# Altium PCB Hydro-Node.PcbDoc
Units mm, origin at the board's own origin, x right, y up, seen from the top; angles counter-clockwise.
Board outline 90 x 70 mm, 2 copper layers (Top Layer, Bottom Layer); 22 components, 21 nets, 99 pads, 0 vias.
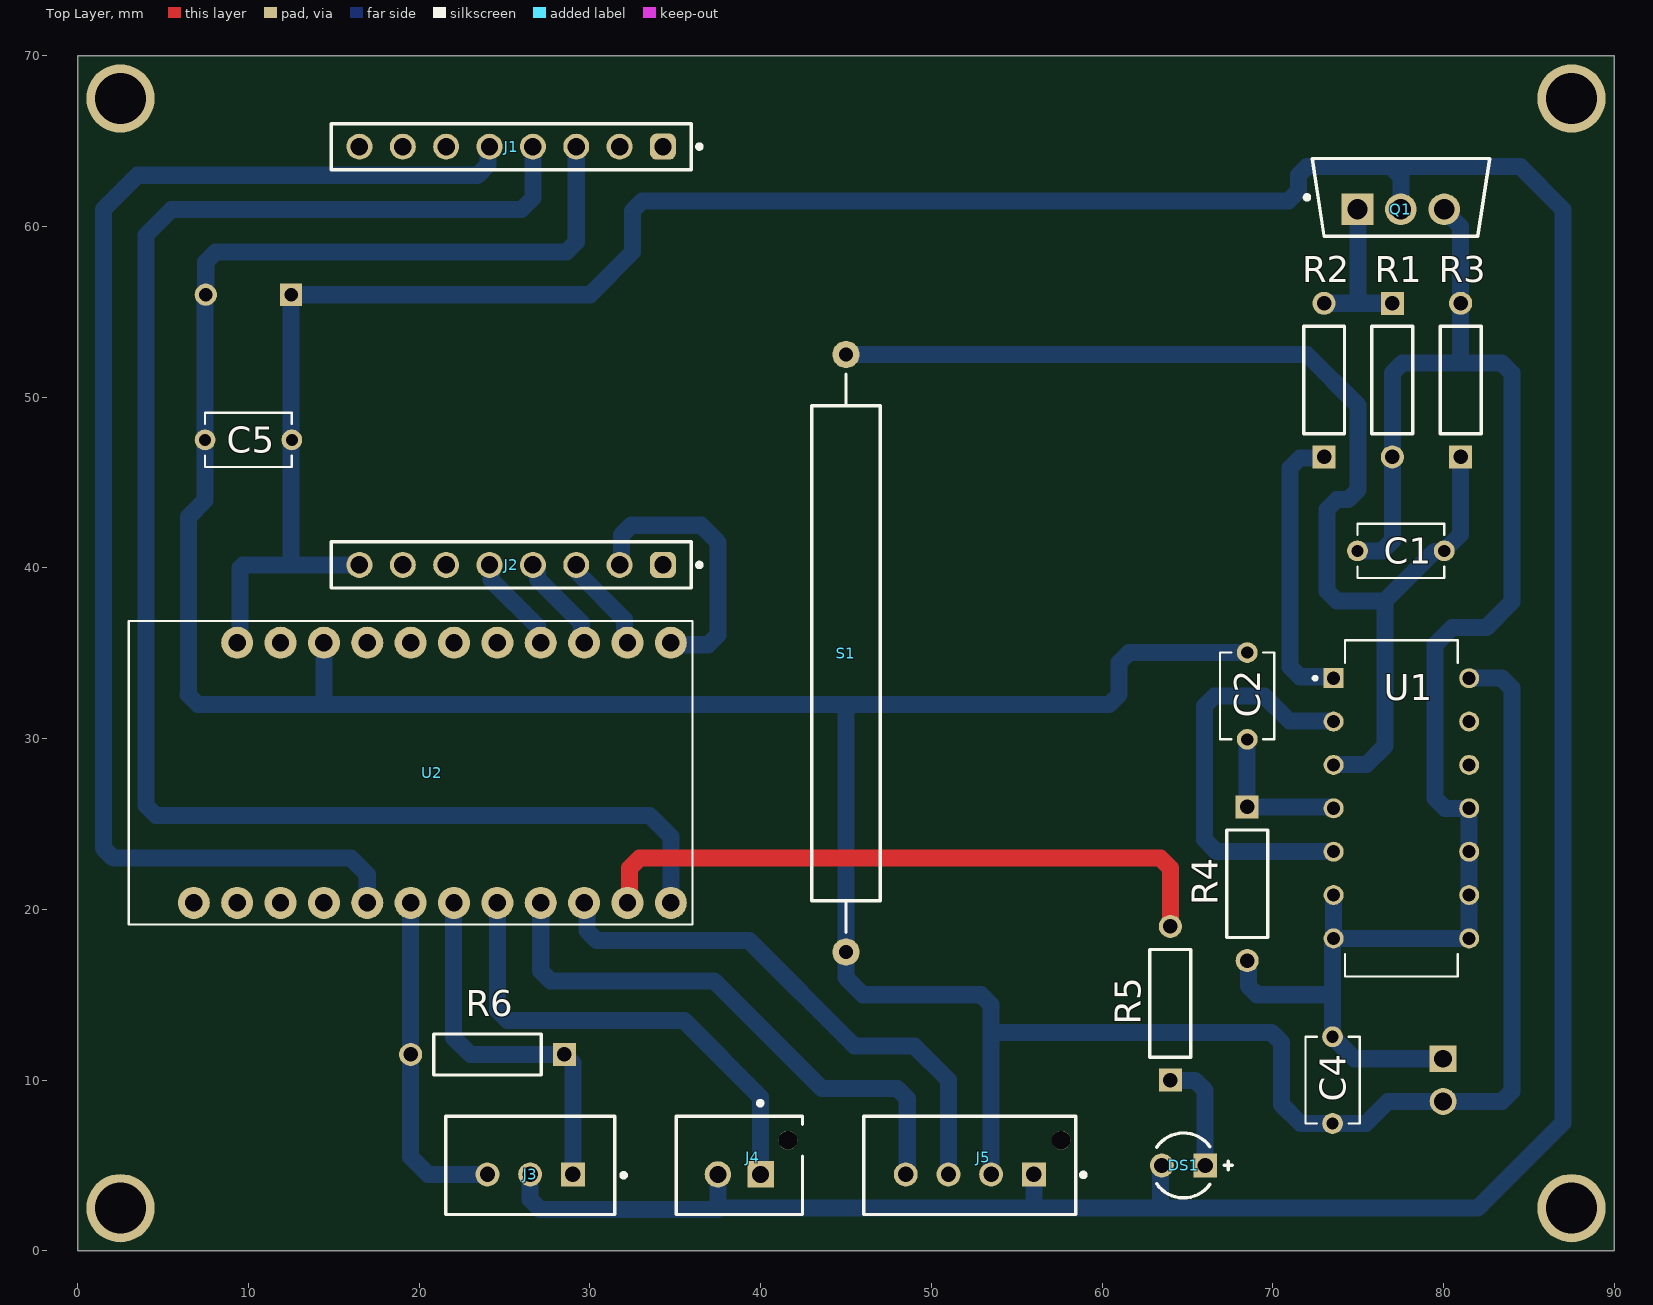
[diagram p0: Top Layer view]
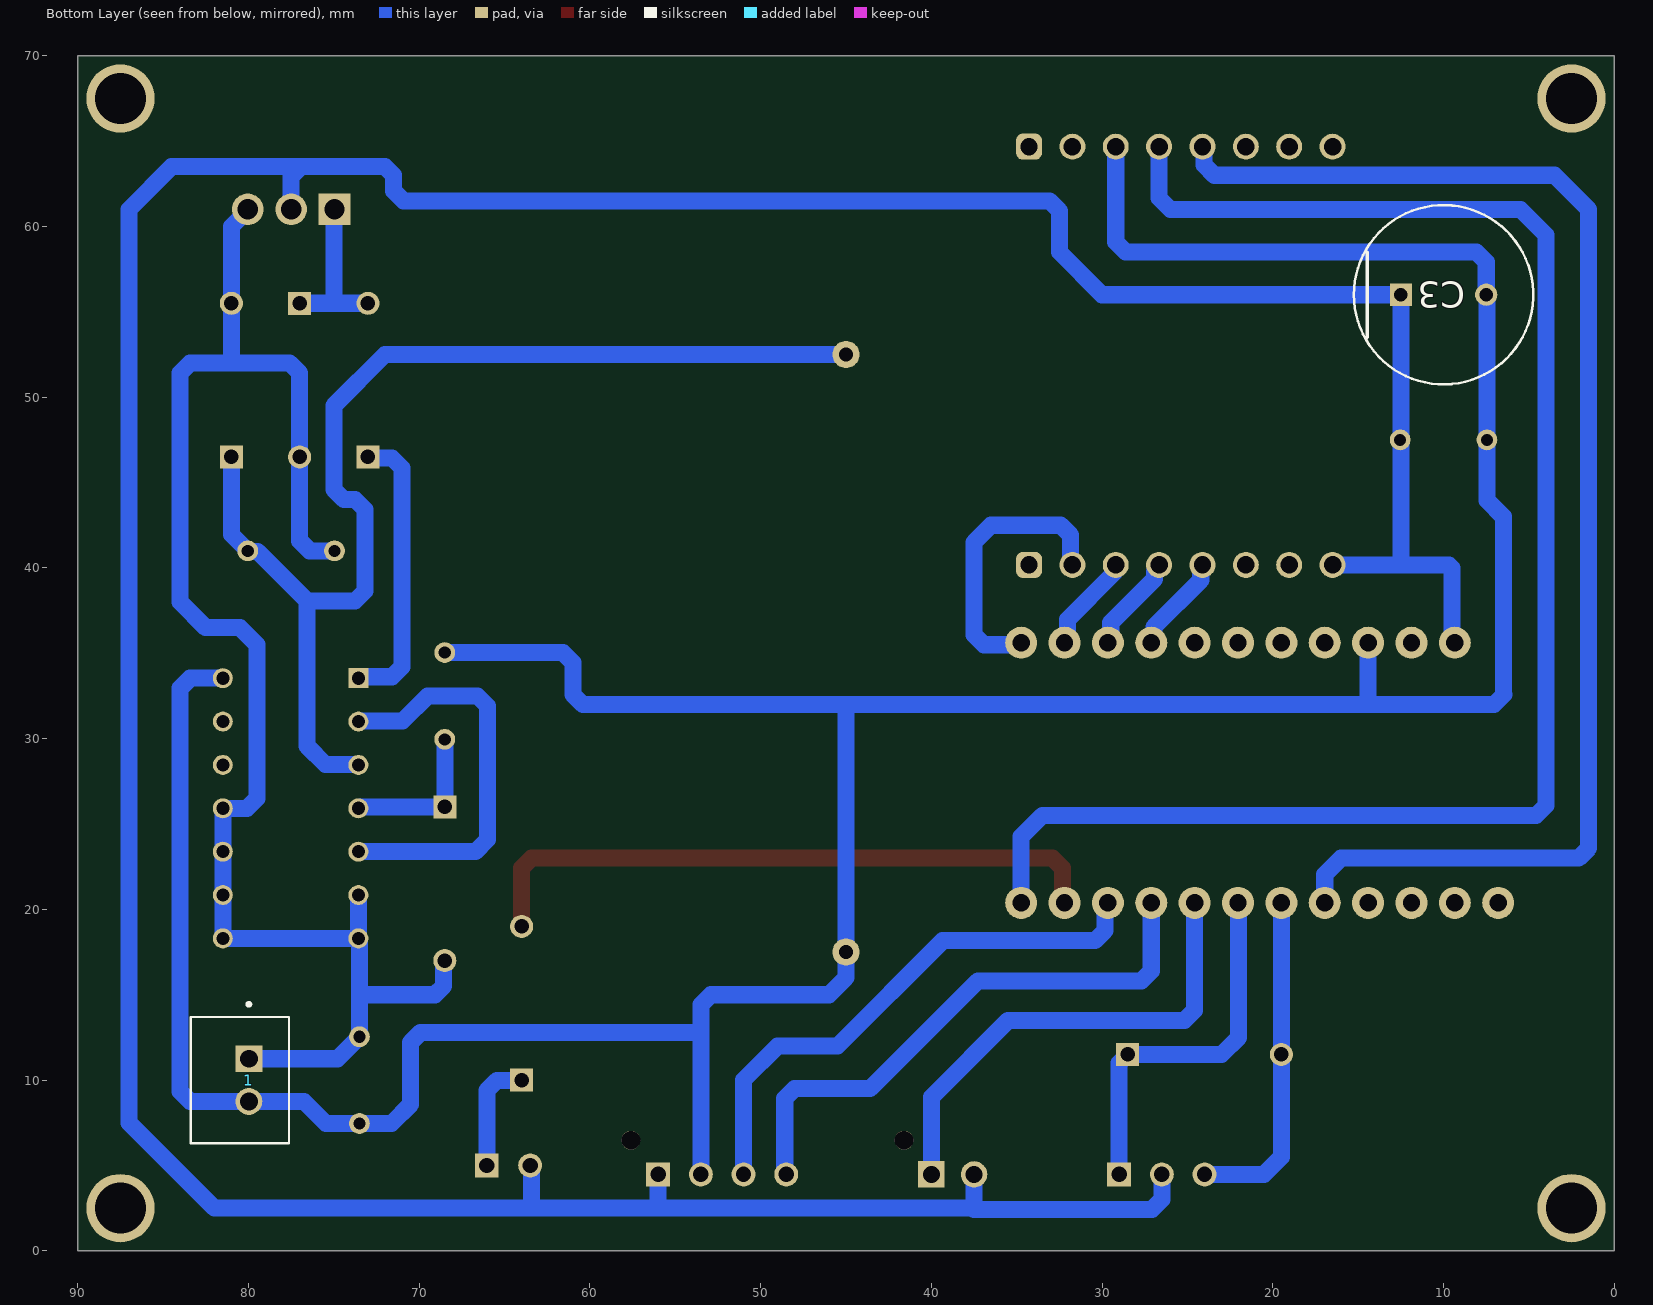
[diagram p1: Bottom Layer view, seen from below]
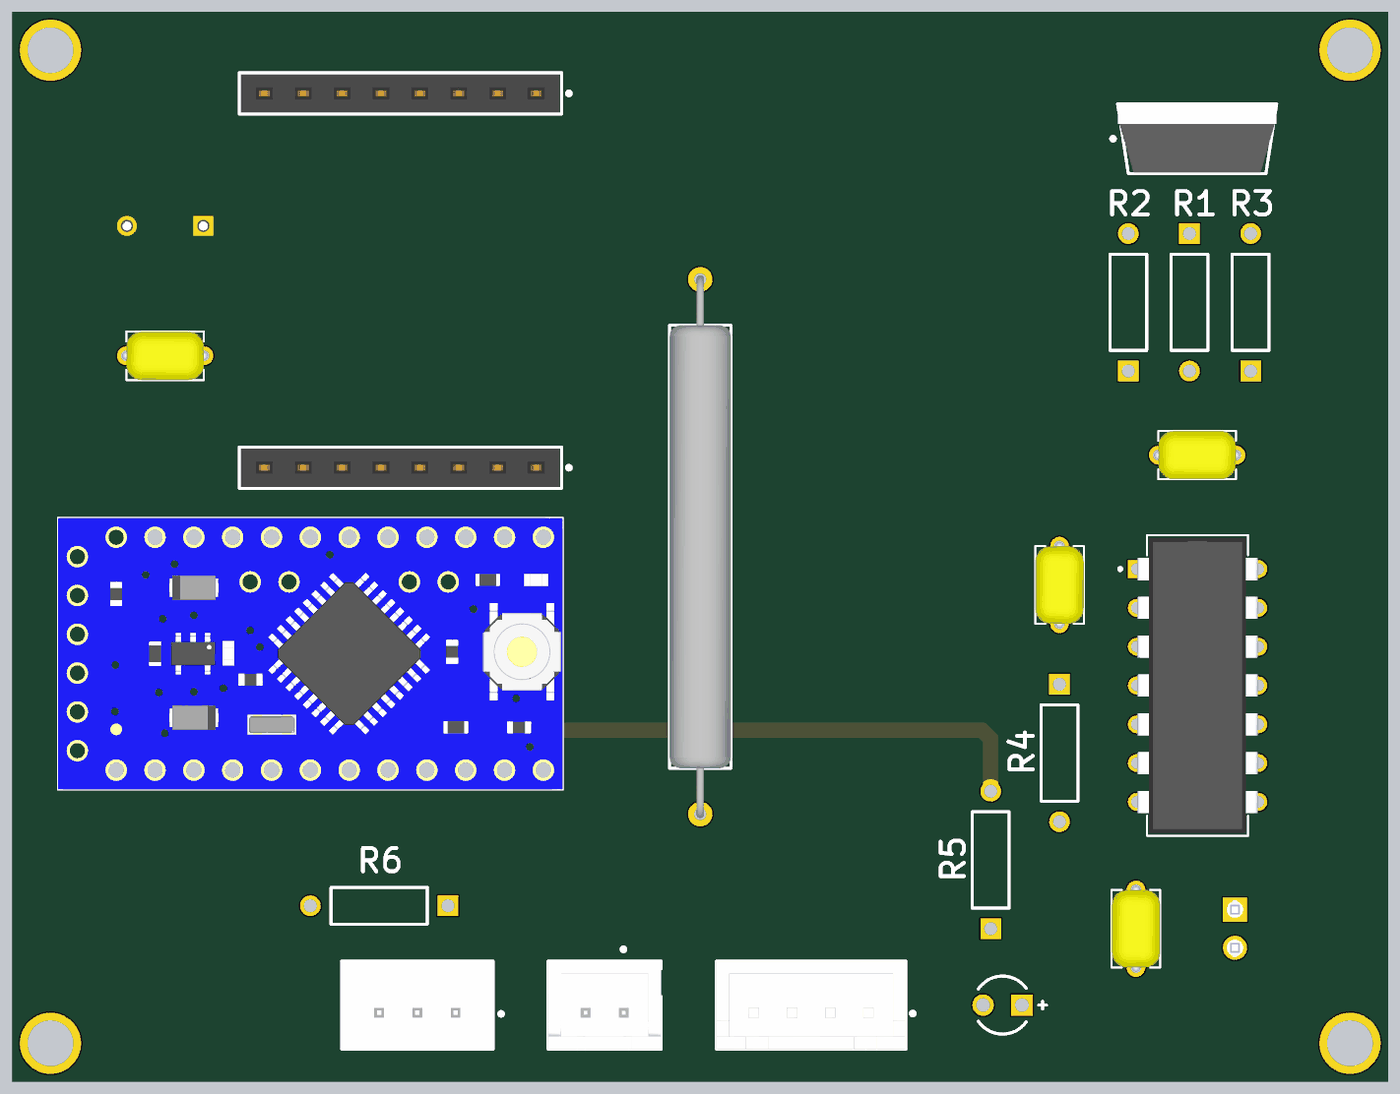
[diagram p2: 3D render of the assembled board from above, using the file's embedded part models]

## Layer stack, top to bottom
Top Solder: solder mask 0.0102, Solder Resist, Dk 3.5
Top Layer: signal copper 0.0356
Dielectric 1: dielectric 0.32, FR-4, Dk 4.8
Bottom Layer: signal copper 0.0356
Bottom Solder: solder mask 0.0102, Solder Resist, Dk 3.5

## Board outline
0,0 0,70 90,70 90,0

## Design rules (kind name [scope] priority, off if disabled: settings)
Clearance [All] p1: gap=0.254 ignorepadtopadclearanceinfootprint=FALSE
HoleSize [All] p1: absolutevalues=TRUE maxlimit=5 minlimit=0.025 maxpercent=80.000 minpercent=20.000
PolygonConnect [All] p1: connectstyle=Relief reliefconductorwidth=0.254 reliefentries=4 polygonreliefangle="90 Angle" airgapwidth=0.254
RoutingVias [All] p1: holewidth=0.711 width=1.27 viastyle="Through Hole" minholewidth=0.711 minwidth=1.27 maxholewidth=0.711 maxwidth=1.27
SolderMaskExpansion [All] p1: expansion=0.102 istentingtop=FALSE
Width [All] p1: maxlimit=1.5 minlimit=0.5 preferedwidth=1
29 further rules are at their usual default settings.

## Classes and differential pairs
component class Sheet3: 1 " " C1 C2 C3 C4 DS1 J1 J2 J3 J4 J5 Q1 R5 S1 U1 U2

## Components (designator, comment, footprint, x,y, rotation, side; value= is the part's Value field where it differs from the comment)
1 "Battery" JST_B2B-XH-A_(LF)(SN) 80.5,10 r90 bottom
C1 "100nF" CAPRR508W50L508T317H508 77.5,41 r0 top
C2 "100nF" CAPRR508W50L508T317H508 68.5,32.5 r270 top
C3 "2200uF 16v" FP-RAD-TH-D_10_0_5-L_16_1-MFG 10,56 r180 bottom
C4 "100nF" CAPRR508W50L508T317H508 73.5,10 r90 top
C5 "100nF" CAPRR508W50L508T317H508 10,47.5 r180 top
DS1 "LED" INDPR60-254-520X380X650 64.77,5 r180 top
J1 "61300811821" 61300811821 25.39,64.675 r180 top
J2 "61300811821" 61300811821 25.39,40.175 r180 top
J3 "Temp" FP-B3B-XH-A_LF_SN-MFG 26.5,5 r180 top
J4 "FLOW" FP-B2B-XH-AM_LF_SN-MFG 38.75,5 r0 top
J5 "Ultrasonic" FP-B4B-XH-AM_LF_SN-MFG 52.25,5 r0 top
Q1 "IRLZ44N" FP-PG-TO220-3-MFG 77.5,61.705 r90 top
R1 "1 MΩ" RESA60-630X240 77,51 r270 top
R2 "1 KΩ" RESA60-630X240 73,51 r90 top
R3 "10 kΩ" RESA60-630X240 81,51 r90 top
R4 "100 kΩ" RESA60-630X240 68.5,21.5 r270 top
R5 "330 Ω" RESA60-630X240 64,14.5 r90 top
R6 "4.7 kΩ" RESA60-630X240 24,11.5 r180 top
S1 "Reed Switch SPST-NO 4x29mm" REEDSW-THT-D4L29-P35 45,35 r270 top value="SPST-NO Reed"
U1 "CD4013BE" DIP794W45P254L1969H508Q14 77.53,25.92 r0 top
U2 "ARDUINO_PRO_MINI" MODULE_ARDUINO_PRO_MINI 19.5,28 r90 top

## Footprints (in the part's own frame and the unit in brackets; to place one, negate y for a bottom-side part, rotate by r counter-clockwise, add the part's x,y. Pads: shape width x height; smd on the part's side, far side on the other; paste and mask are expansions set on the pad)
61300811821 [mm] "Socket Header, Pitch 2.54 mm, THT, Vertical, single row, 8p"
  rrect50% 1.52x1.52 hole 1.02: 1(-8.89,0)
  round 1.52 hole 1.02: 2(-6.35,0) 3(-3.81,0) 4(-1.27,0) 5(1.27,0) 6(3.81,0) 7(6.35,0) 8(8.89,0)
  silkscreen extent -11.15,-1.35 10.54,1.35, body extent -10.41,-1.25 10.41,1.25, height 8.55
CAPRR508W50L508T317H508 [mm]
  round 1.218 hole 0.71: 1(-2.54,0) 2(2.54,0)
  silkscreen extent -2.54,-1.59 2.54,1.59, body extent -2.79,-1.59 2.79,1.59, height 5.86
DIP794W45P254L1969H508Q14 [mm]
  rect 1.17x1.17 / inner round 1.17 / far side rect 1.17x1.17 hole 0.77 mask+0.102: 1(-3.97,7.62)
  round 1.17 hole 0.77 mask+0.102: 2(-3.97,5.08) 3(-3.97,2.54) 4(-3.97,0) 5(-3.97,-2.54) 6(-3.97,-5.08) 7(-3.97,-7.62) 8(3.97,-7.62) 9(3.97,-5.08) 10(3.97,-2.54) 11(3.97,0) 12(3.97,2.54) 13(3.97,5.08) 14(3.97,7.62)
  silkscreen extent -5.15,-9.84 3.3,9.84, body extent -3.94,-9.65 3.94,9.65, height 5.08
FP-B2B-XH-AM_LF_SN-MFG [mm]
  rect 1.55x1.55 hole 1 paste-2539.97 mask+0: 1(1.25,-0.525)
  round 1.55 hole 1 paste-2539.97 mask+0: 2(-1.25,-0.525)
  round 1.1 hole 1.1 unplated paste-2539.97 mask+0: ""(2.85,1.475)
  silkscreen extent -3.7,-2.88 3.7,3.77, body extent -3.8,-2.98 3.8,2.98, height 0.25
FP-B3B-XH-A_LF_SN-MFG [mm]
  rect 1.4x1.4 hole 0.9 paste-2539.97 mask+0: 1(-2.5,0.525)
  round 1.4 hole 0.9 paste-2539.97 mask+0: 2(0,0.525) 3(2.5,0.525)
  silkscreen extent -5.6,-2.88 4.95,2.88, body extent -5.05,-2.98 5.05,2.98, height 0.25
FP-B4B-XH-AM_LF_SN-MFG [mm]
  rect 1.4x1.4 hole 0.9 paste-2539.97 mask+0: 1(3.75,-0.525)
  round 1.4 hole 0.9 paste-2539.97 mask+0: 2(1.25,-0.525) 3(-1.25,-0.525) 4(-3.75,-0.525)
  round 1.1 hole 1.1 unplated paste-2539.97 mask+0: ""(5.35,1.475)
  silkscreen extent -6.2,-2.88 6.78,2.88, body extent -6.3,-2.98 6.3,2.98, height 0.25
FP-PG-TO220-3-MFG [mm]
  rect 1.85x1.85 hole 1.2 paste-2539.97 mask+0: 1(-0.705,2.54)
  round 1.85 hole 1.2 paste-2539.97 mask+0: 2(-0.705,0) 3(-0.705,-2.54)
  silkscreen extent -2.27,-5.2 2.27,5.62, body extent -2.37,-5.55 2.37,5.55, height 0.25
FP-RAD-TH-D_10_0_5-L_16_1-MFG [mm]
  rect 1.3x1.3 hole 0.8 paste-2539.97 mask+0: 1(-2.5,0)
  round 1.3 hole 0.8 paste-2539.97 mask+0: 2(2.5,0)
  silkscreen extent -5.25,-5.25 5.25,5.25, body extent -5,-5.01 4.99,4.99, height 17.5
INDPR60-254-520X380X650 [mm] "THD, 2-Leads, Dia 3.8mm, Pitch 2.54mm"
  rect 1.4x1.4 hole 0.9: 1(-1.27,0)
  round 1.4 hole 0.9: 2(1.27,0)
  silkscreen extent -2.87,-1.9 1.58,1.9, body extent -1.9,-1.9 1.9,1.9, height 6.5
JST_B2B-XH-A_(LF)(SN) [mm]
  rect 1.575x1.575 / inner round 1.575 / far side rect 1.575x1.575 hole 1.05: 1(1.25,-0.525)
  round 1.575 hole 1.05: 2(-1.25,-0.525)
  silkscreen extent -3.7,-2.88 4.54,2.88, body extent -3.7,-2.88 3.7,2.88, height 7
MODULE_ARDUINO_PRO_MINI [mil]
  round 74 hole 40: JP6_2(300,400) JP6_3(300,300) JP6_4(300,200) JP6_5(300,100) JP6_6(300,0) JP6_7(300,-100) JP6_8(300,-200) JP6_9(300,-300) JP6_10(300,-400) JP6_11(300,-500) JP6_12(300,-600) JP7_1(-300,-600) JP7_2(-300,-500) JP7_3(-300,-400) JP7_4(-300,-300) JP7_5(-300,-200) JP7_6(-300,-100) JP7_7(-300,0) JP7_8(-300,100) JP7_9(-300,200) JP7_10(-300,300) JP7_11(-300,400) JP7_12(-300,500)
  silkscreen extent -350,-650 350,650, body extent -350,-650 350,650, height 133
REEDSW-THT-D4L29-P35 [mm] "Magnetic reed switch, normally open, glass body 4.0 x 29.0 mm, axial leads bent for 35.0 mm through-hole pitch"
  round 1.6 hole 0.8: 1(-17.5,0) 2(17.5,0)
  silkscreen extent -16.35,-2 16.35,2, body extent -17.75,-1.99 17.75,1.99, height 4
RESA60-630X240 [mm] "Axial Resistor, 2-Leads, Dia 2.4mm, Body Length 6.3mm"
  rect 1.35x1.35 hole 0.85: 1(-4.5,0)
  round 1.35 hole 0.85: 2(4.5,0)
  silkscreen extent -3.15,-1.2 3.15,1.2, body extent -3.15,-1.2 3.15,1.2, height 2.4

## Part data
1: library part B2B-XH-A_(LF)(SN), "Connector Header Through Hole 2 position 0.098 (2.50mm)", Package=None, Check_prices=https://www.snapeda.com/parts/B2B-XH-A%20(LF)(SN)/JST+Sales+America+Inc./view-part/?ref=eda, MF="JST Sales", MP="B2B-XH-A (LF)(SN)", SnapEDA_Link=https://www.snapeda.com/parts/B2B-XH-A%20(LF)(SN)/JST+Sales+America+Inc./view-part/?ref=snap
C1 C2 C4 C5: library part SR215E104MARTR1., "SR Series 5.08x5.08 mm 100 nF 50 V Â±20% Tol. Z5U Radial Lead/SkyCapÂ®", Package="Radial AVX Interconnect / Elco", Capacitance=100nF, Check_prices=https://www.snapeda.com/parts/SR215E104MARTR1/AVX/view-part/?ref=eda, MF=AVX, MP=SR215E104MARTR1, SnapEDA_Link=https://www.snapeda.com/parts/SR215E104MARTR1/AVX/view-part/?ref=snap
C3: library part CMP-05427-001178-1, "Aluminum Electrolytic Capacitors (Radial Lead Type) 2200uF ±20% 16v"
DS1: library part CMP-1674-00005-1, "Radial LED, 12.6 mcd, 20 mA, 2 V, -55 to 100 degC, 2-Pin THD, RoHS, Bulk", Case\Package=Radial, Current Rating="3.6 A", Max Operating Temperature="130 degC", Min Operating Temperature="-40 degC", Package Quantity=55, Resistance="0.045 Ohm", Tolerance=20%, ComponentLink1Description="Manufacturer URL", ComponentLink1URL=http://www.us.liteon.com/, ComponentLink2Description=Datasheet, ComponentLink2URL=https://datasheet.ciiva.com/15117/getdatasheetpartid-187746-15117985.pdf, DatasheetVersion=Dec-03, Height="1.1 inch", Lead Pitch="11.44 mm", Length="0.97 inch", Mount="Through Hole", PackageDescription="2-Pin Through Hole Device, Dia 3.8 mm, Pitch 2.54 mm", PackageReference=LTL-1CHE, Packaging=Tray, Radiation Hardening=No, RoHSCompliant=true, Shielding=Unshielded, Width="0.62 inch"
J1 J2: library part CMP-1502-01327-4, "Btb Conn, Rcpt, 8Pos, 1Row, 2.54Mm Rohs Compliant: Yes", Contact Resistance=20mΩ, Current Rating=3A, Operating Supply Voltage=250V, Gender=Female, Lead Pitch=2.54mm, Number of Pins=8, Orientation=Vertical, RoHS=Non-Compliant
J3: library part CMP-17439-000014-3, "CONN HEADER VERT 3POS 2.5MM", Color=Natural, Contact Resistance=20mR, Current Rating=3A, Flammability Rating="UL94 V-0", Housing Color=White, Insulation Resistance=1GR, Max Operating Temperature=85°C, Max Voltage Rating (AC)=250V, Min Operating Temperature=-25°C, Connector Type=Header, Contact Finish - Mating=TIN, Contact Material=Brass, Contact Plating=Tin, Contact Shape=Square, Contact Type="Male Pin", Depth=5.75mm, Fastening Type=Detent, Gender=Male, Housing Material=Polyamide, Insulation Color=Natural, Insulation Material=Nylon, Lead Free="Lead Free", Lead Pitch=2.5mm, Length=9.9mm, Max Current Rating=3A, Max Voltage Rating (DC)=250V, Mount="Through Hole", Number of Contacts=3, Number of Positions=3, Number of Rows=1, Orientation=Straight, Packaging=Bulk, Pitch=2.5mm, REACH SVHC="No SVHC", Series=XH, Termination=Solder, Voltage Rating=250V, Voltage Rating (AC)=250V, Wire/Cable Gauge=22AWG
J4: library part CMP-17439-000037-1, "CONN HEADER VERT 2POS 2.5MM", Color=Green, Contact Resistance=20mR, Housing Color=White, Max Current Rating=3A, Max Operating Temperature=85°C, Max Voltage Rating (AC)=250V, Min Operating Temperature=-25°C, Connector Type="Male Pin", Contact Material=Brass, Contact Plating=Tin, Contact Type="Male Pin", Depth=5.75mm, Fastening Type=Detent, Housing Material=Polyamide, Lead Free="Lead Free", Length=7.4mm, Mount="Through Hole", Number of Positions=2, Number of Rows=1, Orientation=Straight, Packaging=Bulk, Pitch=2.5mm, Series=XH, Termination=Solder
J5: library part CMP-17439-000117-1, "CONN HEADER VERT 4POS 2.5MM", Color=Green, Contact Resistance=20mR, Flammability Rating="UL94 V-0", Housing Color=White, Insulation Color=Natural, Max Current Rating=3A, Max Operating Temperature=85°C, Max Voltage Rating (AC)=250V, Min Operating Temperature=-25°C, Connector Type=Header, Contact Finish - Mating=TIN, Contact Material=Brass, Contact Plating=Copper, Contact Shape=Square, Contact Type="Male Pin", Depth=5.75mm, Fastening Type=Detent, Gender=Male, Housing Material=Polyamide, Insulation Material=Nylon, Lead Free="Lead Free", Length=12.4mm, Mated Stacking Heights=9.8mm, Mount="Through Hole", Number of Pins=4, Number of Positions=4, Number of Rows=1, Orientation=Straight, Packaging=Bulk, Pitch=2.5mm, Series=XH, Termination=Solder, Voltage Rating=250V
Q1: library part CMP-32901-000488-1, "MOSFET N-CH 55V 47A TO220AB", Case/Package=TO-220, Continuous Drain Current (ID)=47A, Drain to Source Breakdown Voltage=55V, Drain to Source Resistance=35mR, Gate to Source Voltage (Vgs)=16V, Input Capacitance=1.7nF, Max Operating Temperature=175°C, Max Power Dissipation=110W, Min Operating Temperature=-55°C, Threshold Voltage=2V, Drain to Source Voltage (Vdss)=55V, Element Configuration=Single, Halogen Free="Halogen Free", Height=0.6inch, Lead Free="Lead Free", Length=0.414inch, Max Dual Supply Voltage=55V, Mount="Through Hole", Number of Pins=3, Packaging=Rail/Tube, Power Dissipation=110W, Rds On Max=22mR, REACH SVHC="No SVHC", RoHS Compliant=Yes, Turn-Off Delay Time=26ns, Turn-On Delay Time=11ns, Width=0.185inch
R1: library part CMP-1659-00070-1, "Axial Resistor, 1 MOhm, +/- 1%, 250 mW, -55 to 155 degC, 2-Pin THD, RoHS, Bulk", Case\Package=Axial, Max Operating Temperature="155 degC", Min Operating Temperature="-55 degC", Package Quantity=200, Power Rating="250 mW", Resistance="1MΩ ohm", Tolerance=1%, Voltage Rating="250 V", ComponentLink1Description="Manufacturer URL", ComponentLink1URL=http://www.yageo.com/, ComponentLink2Description=Datasheet, ComponentLink2URL=http://www.yageo.com/documents/recent/Yageo%20LR_MFR_2013.pdf, DatasheetVersion=Apr-13, Length="0.248 inch", Mount="Through Hole", PackageDescription="2-Pin Axial Lead, Dia 2.4 mm, Body Length 6.3 mm", PackageReference=MFR-25, Packaging=Bulk, RoHSCompliant=true
R2: library part CMP-1659-00075-1, "Axial Resistor, 1 KOhm, +/- 1%, 250 mW, -55 to 155 degC, 2-Pin THD, RoHS, Bulk", Case\Package=Axial, Max Operating Temperature="155 degC", Min Operating Temperature="-55 degC", Package Quantity=200, Power Rating="250 mW", Resistance="1kΩ ohm", Tolerance=1%, Voltage Rating="250 V", ComponentLink1Description="Manufacturer URL", ComponentLink1URL=http://www.yageo.com/, ComponentLink2Description=Datasheet, ComponentLink2URL=http://www.yageo.com/documents/recent/Yageo%20LR_MFR_2013.pdf, DatasheetVersion=Apr-13, Length="0.248 inch", PackageDescription="2-Pin Axial Lead, Dia 2.4 mm, Body Length 6.3 mm", PackageReference=MFR-25, Packaging=Bulk, RoHSCompliant=true
R3: library part CMP-1659-00074-2, "Axial Resistor, 10 KOhm, +/- 1%, 0.25 W, -55 to 155 degC, 2-Pin THD, RoHS, Bulk", Case\/Package=Axial, Manufacturer=Yageo, Max Operating Temperature=155degC, Max Power Dissipation=250mW, Min Operating Temperature=-55degC, Package Description="2-Pin Axial Lead, Dia 2.4 mm, Body Length 6.3 mm", Package Quantity=200, Package Reference=MFR-25, Resistance="10KΩ Ohm", Temperature Coefficient=100ppm\/degreesC, Tolerance=1%, Voltage Rating=250V, Voltage Rating (DC)=200V, Composition=MetalFilm, Datasheet URL=http://www.yageo.com/documents/recent/Yageo%20LR_MFR_2013.pdf, Datasheet Version=04/2013, Lead Free=LeadFree, Length=0.248inch, Manufacturer URL=http://www.yageo.com/, Military Standard=Not, Mount=ThroughHole, Mounting Technology=ThroughHole, Number of Terminations=2, Packaging=Bulk, Power Rating=250mW, RoHSCompliant=True, Termination=Axial
R4: library part CMP-1659-00073-1, "Axial Resistor, 100 KOhm, +/- 1%, 0.25 W, -55 to 155 degC, 2-Pin THD, RoHS, Bulk", Case\Package=Axial, Max Operating Temperature="155 degC", Min Operating Temperature="-55 degC", Package Quantity=200, Power Rating="250 mW", Resistance="100KΩ Ohm", Tolerance=1%, Voltage Rating="250 V", ComponentLink1Description="Manufacturer URL", ComponentLink1URL=http://www.yageo.com/, ComponentLink2Description=Datasheet, ComponentLink2URL=http://www.yageo.com/documents/recent/Yageo%20LR_MFR_2013.pdf, DatasheetVersion=Apr-13, Length="0.248 inch", Mount="Through Hole", PackageDescription="2-Pin Axial Lead, Dia 2.4 mm, Body Length 6.3 mm", PackageReference=MFR-25, Packaging=Bulk, RoHSCompliant=true
R5: library part CMP-1659-00070-1, "Axial Resistor, 330 Ohm, +/- 1%, 250 mW, -55 to 155 degC, 2-Pin THD, RoHS, Bulk", Case\Package=Axial, Max Operating Temperature="155 degC", Min Operating Temperature="-55 degC", Package Quantity=200, Power Rating="250 mW", Resistance="330Ω ohm", Tolerance=1%, Voltage Rating="250 V", ComponentLink1Description="Manufacturer URL", ComponentLink1URL=http://www.yageo.com/, ComponentLink2Description=Datasheet, ComponentLink2URL=http://www.yageo.com/documents/recent/Yageo%20LR_MFR_2013.pdf, DatasheetVersion=Apr-13, Length="0.248 inch", Mount="Through Hole", PackageDescription="2-Pin Axial Lead, Dia 2.4 mm, Body Length 6.3 mm", PackageReference=MFR-25, Packaging=Bulk, RoHSCompliant=true
R6: library part CMP-1659-00066-1, "Axial Resistor, 4.7 KOhm, +/- 1%, 0.25 W, -55 to 155 degC, 2-Pin THD, RoHS, Bulk", Case Code (Imperial)=1210, Case Code (Metric)=3225, Max Operating Temperature="125 degC", Min Operating Temperature="-55 degC", Package Quantity=1000, Resistance="4.7KΩ Ohm", Tolerance=10%, Type (Capacitors)=X7R, Voltage Rating="25 V", Case\Package=1210, ComponentLink1Description="Manufacturer URL", ComponentLink1URL=http://www.yageo.com/, ComponentLink2Description=Datasheet, ComponentLink2URL=http://www.yageo.com/documents/recent/Yageo%20LR_MFR_2013.pdf, DatasheetVersion=Apr-13, Height="2.5 mm", Length="3.2 mm", Mount="Surface Mount", PackageDescription="2-Pin Axial Lead, Dia 2.4 mm, Body Length 6.3 mm", PackageReference=MFR-25, Packaging="Tape and Reel", Pins=2, Radiation Hardening=No, REACH SVHC="No SVHC", RoHSCompliant=true, Voltage Rating (DC)="25 V", Width="2.5 mm"
S1: library part REED-SWITCH-NO-D4L29, "Magnetic reed switch, normally open, glass body 4.0 x 29.0 mm, axial leads bent for 35.0 mm through-hole pitch", Contact Rating="TBD - see datasheet", Manufacturer=Littelfuse, Manufacturer Part Number=MDSM-4R-12-18, Package=MDSM-4, Temperature="-40°C to +125°C", Temperature Range High=+125°C, Temperature Range Low=-40°C, Automotive=No, Body Size="4.0 x 29.0 mm glass", Category=Switch, ComponentLink2Description=Datasheet, ComponentLink2URL=https://www.littelfuse.com/~/media/electronics/datasheets/reed_switches/littelfuse_reed_switches_mdsm_4_datasheet.pdf.pdf, Device Class L1=Electromechanical, Device Class L2=Switches, Device Class L3=unset, Digikey Description="SWITCH REED SPST-NO 350MA 140V", Height=2.84mm, Lead Free=Yes, Lead Pitch="35.0 mm", Mouser Description="Magnetic / Reed Switches MDSM-4R 5277 12-18", Octopart=https://octopart.com/mdsm-4r-12-18-littelfuse-55632078, Pull-In Sensitivity="TBD AT", RoHS=TRUE, Standoff Height=0mm
U1: "CMOS Dual D-Type Flip Flop", Package="PDIP-14 Texas Instruments", Check_prices=https://www.snapeda.com/parts/CD4013BE/Texas+Instruments/view-part/?ref=eda, MF="Texas Instruments", MP=CD4013BE, SnapEDA_Link=https://www.snapeda.com/parts/CD4013BE/Texas+Instruments/view-part/?ref=snap
U2: "This board was developed for applications and installations where space is premium and projects are made as permanent set ups. Small, available in 3.3 V and 5 V versions, powered by ATmega328P.", Package=None, Check_prices=https://www.snapeda.com/parts/Arduino%20Pro%20Mini/Arduino/view-part/?ref=eda, MF=Arduino, MP="Arduino Pro Mini", SnapEDA_Link=https://www.snapeda.com/parts/Arduino%20Pro%20Mini/Arduino/view-part/?ref=snap

## Free pads (board coordinates)
  round 4 hole 3: 4(2.5,2.5) 4(2.5,67.5) 4(87.5,2.5) 4(87.5,67.5)

## Nets (pads, with @x,y where several pads share a name; then routed paths per layer and width w, separated by ;. In a path a pad name is that pad's centre, name@x,y a point inside that pad or via, vN(x,y) a via of type N, cw(c..) or ccw(c..) an arc to the next point about the centre after c; other vN are vias at no path point)
Net1_1: 1.1 C1.1 C4.2 Q1.3 R1.2 R3.2 R4.2 U1.6 U1.7 U1.8 U1.9 U1.10 U1.11 | length 96.3
  Bottom Layer w1: R4.2 68.567,16.933 68.567,15.519 69.086,15 73.11,15 ; U1.7@73.504,18.244 73.527,18.221 73.527,18.147 73.5,18.12 73.5,15.39 73.5,15 C4.2 74.79,11.25 1.1 ; U1.6 U1.7 U1.8 U1.9 U1.10 U1.11 80.086,25.92 79.5,26.506 79.5,35.5 80.5,36.5 82.5,36.5 84,38 84,51.414 83.414,52 81,52 ; C1.1 76.414,41 77,41.586 77,51.414 77.586,52 81,52 ; Q1.3 80.04,60.949 81,59.989 81,52
Net1_2: 1.2 C2.1 C3.2 C4.1 C5.2 J1.3 J5.2 S1.2 U1.14 U2.JP6_4 | length 218.8
  Bottom Layer w1: C3.2@7.46,55.96 C5.2 7.46,43.96 6.5,43 6.5,32.626 6.46,32.586 7.046,32 14.5,32 ; C3.2 7.5,57.914 8.086,58.5 28.614,58.5 29.2,59.086 J1.3 ; U2.JP6_4 14.42,32.08 14.5,32 ; J5.2 53.5,12.799 ; C2.1 61.586,35.04 61,34.454 61,32.586 60.414,32 45,32 ; U1.14 83.414,33.54 84,32.954 84,9.336 83.414,8.75 1.2 76.75,8.75 75.46,7.46 C4.1 71.626,7.46 70.5,8.586 70.5,12.213 69.914,12.799 53.5,12.799 ; 14.5,32 45,32 ; 45,32 S1.2 45,16 46,15 52.914,15 53.5,14.414 53.5,12.799
NetC1_2: C1.2 R3.1 S1.1 U1.3 | length 69.4
  Bottom Layer w1: S1.1 72,52.5 75,49.5 75,44.586 74.414,44 73.752,44 73.167,43.414 73.167,38.645 73.752,38.059 76.559,38.059 ; U1.3 73.593,28.493 75.493,28.493 76.559,29.559 76.559,38.059 ; R3.1 81,41.96 79.998,40.958 79.458,40.958 76.559,38.059
NetC2_2: C2.2 R4.1 U1.4 | length 9.1
  Bottom Layer w1: C2.2 R4.1 73.434,26 73.514,25.92 U1.4
NetC3_1: C3.1 C5.1 DS1.2 J2.8 J3.2 J4.2 J5.1 Q1.2 U2.JP6_2 | length 235
  Bottom Layer w1: U2.JP6_2 9.5,35.78 9.5,40 9.675,40.175 12.5,40.175 ; J2.8 12.5,40.175 ; J3.2@26.5,4.5 J3.2 26.5,3.009 27.086,2.423 37.5,2.423 37.5,2.5 ; J4.2 37.5,2.5 ; J5.1 56,2.5 ; DS1.2 63.423,4.923 63.423,2.5 ; Q1.2 77.5,62.914 76.914,63.5 ; 12.5,40.175 12.5,47.5 C3.1 30,56 32.5,58.5 32.5,60.914 33.086,61.5 70.914,61.5 71.5,62.086 71.5,63 72,63.5 76.914,63.5 ; 37.5,2.5 56,2.5 ; 56,2.5 63.423,2.5 ; 63.423,2.5 82,2.5 87,7.5 87,61 84.5,63.5 76.914,63.5
NetDS1_1: DS1.1 R5.1 | length 6.7
  Bottom Layer w1: R5.1 64.017,9.983 65.454,9.983 66.04,9.397 DS1.1
NetJ1_4: J1.4 U2.JP7_1 | length 95.4
  Bottom Layer w1: J1.4 26.66,61.66 26,61 5.5,61 4,59.5 4,26.086 4.586,25.5 33.5,25.5 34.74,24.26 U2.JP7_1
NetJ1_5: J1.5 U2.JP7_8 | length 79.9
  Bottom Layer w1: U2.JP7_8 16.96,22.04 16,23 2.086,23 1.5,23.586 1.5,61 3.5,63 23.427,63 24.021,63.593 24.021,64.576 J1.5
NetJ2_2: J2.2 U2.JP6_12 | length 16.6
  Bottom Layer w1: J2.2 31.839,40.274 31.839,41.914 32.425,42.5 36.5,42.5 37.5,41.5 37.5,36.086 36.914,35.5 34.86,35.5 U2.JP6_12
NetJ2_3: J2.3 U2.JP6_11 | length 5.8
  Bottom Layer w1: J2.3 29.299,40.076 29.299,39.701 32.032,36.968 32.032,35.788 U2.JP6_11
NetJ2_4: J2.4 U2.JP6_10 | length 5.8
  Bottom Layer w1: J2.4 26.66,40.034 26.92,39.774 26.92,39.359 29.492,36.788 29.492,35.788 U2.JP6_10
NetJ2_5: J2.5 U2.JP6_9 | length 5.8
  Bottom Layer w1: J2.5 24.219,40.076 24.219,39.281 26.952,36.548 26.952,35.788 U2.JP6_9
NetJ3_1: J3.1 R6.1 U2.JP7_6 | length 22
  Bottom Layer w1: U2.JP7_6 22,20.34 22,12.5 23,11.5 R6.1 29,11 J3.1
NetJ3_3: J3.3 R6.2 U2.JP7_7 | length 19.8
  Bottom Layer w1: U2.JP7_7 19.5,5.5 20.525,4.475 J3.3
NetJ4_1: J4.1 U2.JP7_5 | length 28.3
  Bottom Layer w1: U2.JP7_5 24.58,14.086 25.166,13.5 35.5,13.5 40,9 J4.1
NetJ5_3: J5.3 U2.JP7_3 | length 32
  Bottom Layer w1: U2.JP7_3 29.828,20.212 29.828,18.754 30.414,18.168 39.332,18.168 45.5,12 49,12 51,10 J5.3
NetJ5_4: J5.4 U2.JP7_4 | length 33
  Bottom Layer w1: U2.JP7_4 27.12,16.394 27.706,15.809 37.277,15.809 43.586,9.5 48,9.5 48.586,8.914 48.586,4.844 48.577,4.834 48.577,4.509 J5.4@48.586,4.5
NetQ1_1: Q1.1 R1.1 R2.2 | length 9.5
  Bottom Layer w1: R2.2 75,55.5 ; Q1.1@75,60.96 75,55.5 ; R1.1 75,55.5
NetR2_1: R2.1 U1.1 | length 16.8
  Bottom Layer w1: R2.1 72.943,46.443 71.586,46.443 71,45.857 71,34.211 71.586,33.625 73.475,33.625 U1.1
NetR5_2: R5.2 U2.JP7_2 | length 37.7
  Top Layer w1: U2.JP7_2 32.32,20.5 32.32,22.414 32.906,23 63.414,23 64,22.414 R5.2
NetU1_2: U1.2 U1.5 | length 24.1
  Bottom Layer w1: U1.5 66.706,23.38 66,24.086 66,31.914 66.586,32.5 69.5,32.5 70.975,31.025 73.535,31.025 U1.2
pads on no net: J1.1 J1.2 J1.6 J1.7 J1.8 J2.1 J2.6 J2.7 J4. J5. U1.12 U1.13 U2.JP6_3 U2.JP6_5 U2.JP6_6 U2.JP6_7 U2.JP6_8 U2.JP7_9 U2.JP7_10 U2.JP7_11 U2.JP7_12